# Altium PCB mainboard.PcbDoc (part 1 of 2)
Units mm, origin at the board's own origin, x right, y up, seen from the top; angles counter-clockwise.
Board outline 90.17 x 95.89 mm, 4 copper layers (F.Cu, Route2, Route15, B.Cu), stack 1.545 mm thick; 95 components, 76 nets, 509 pads, 249 vias.
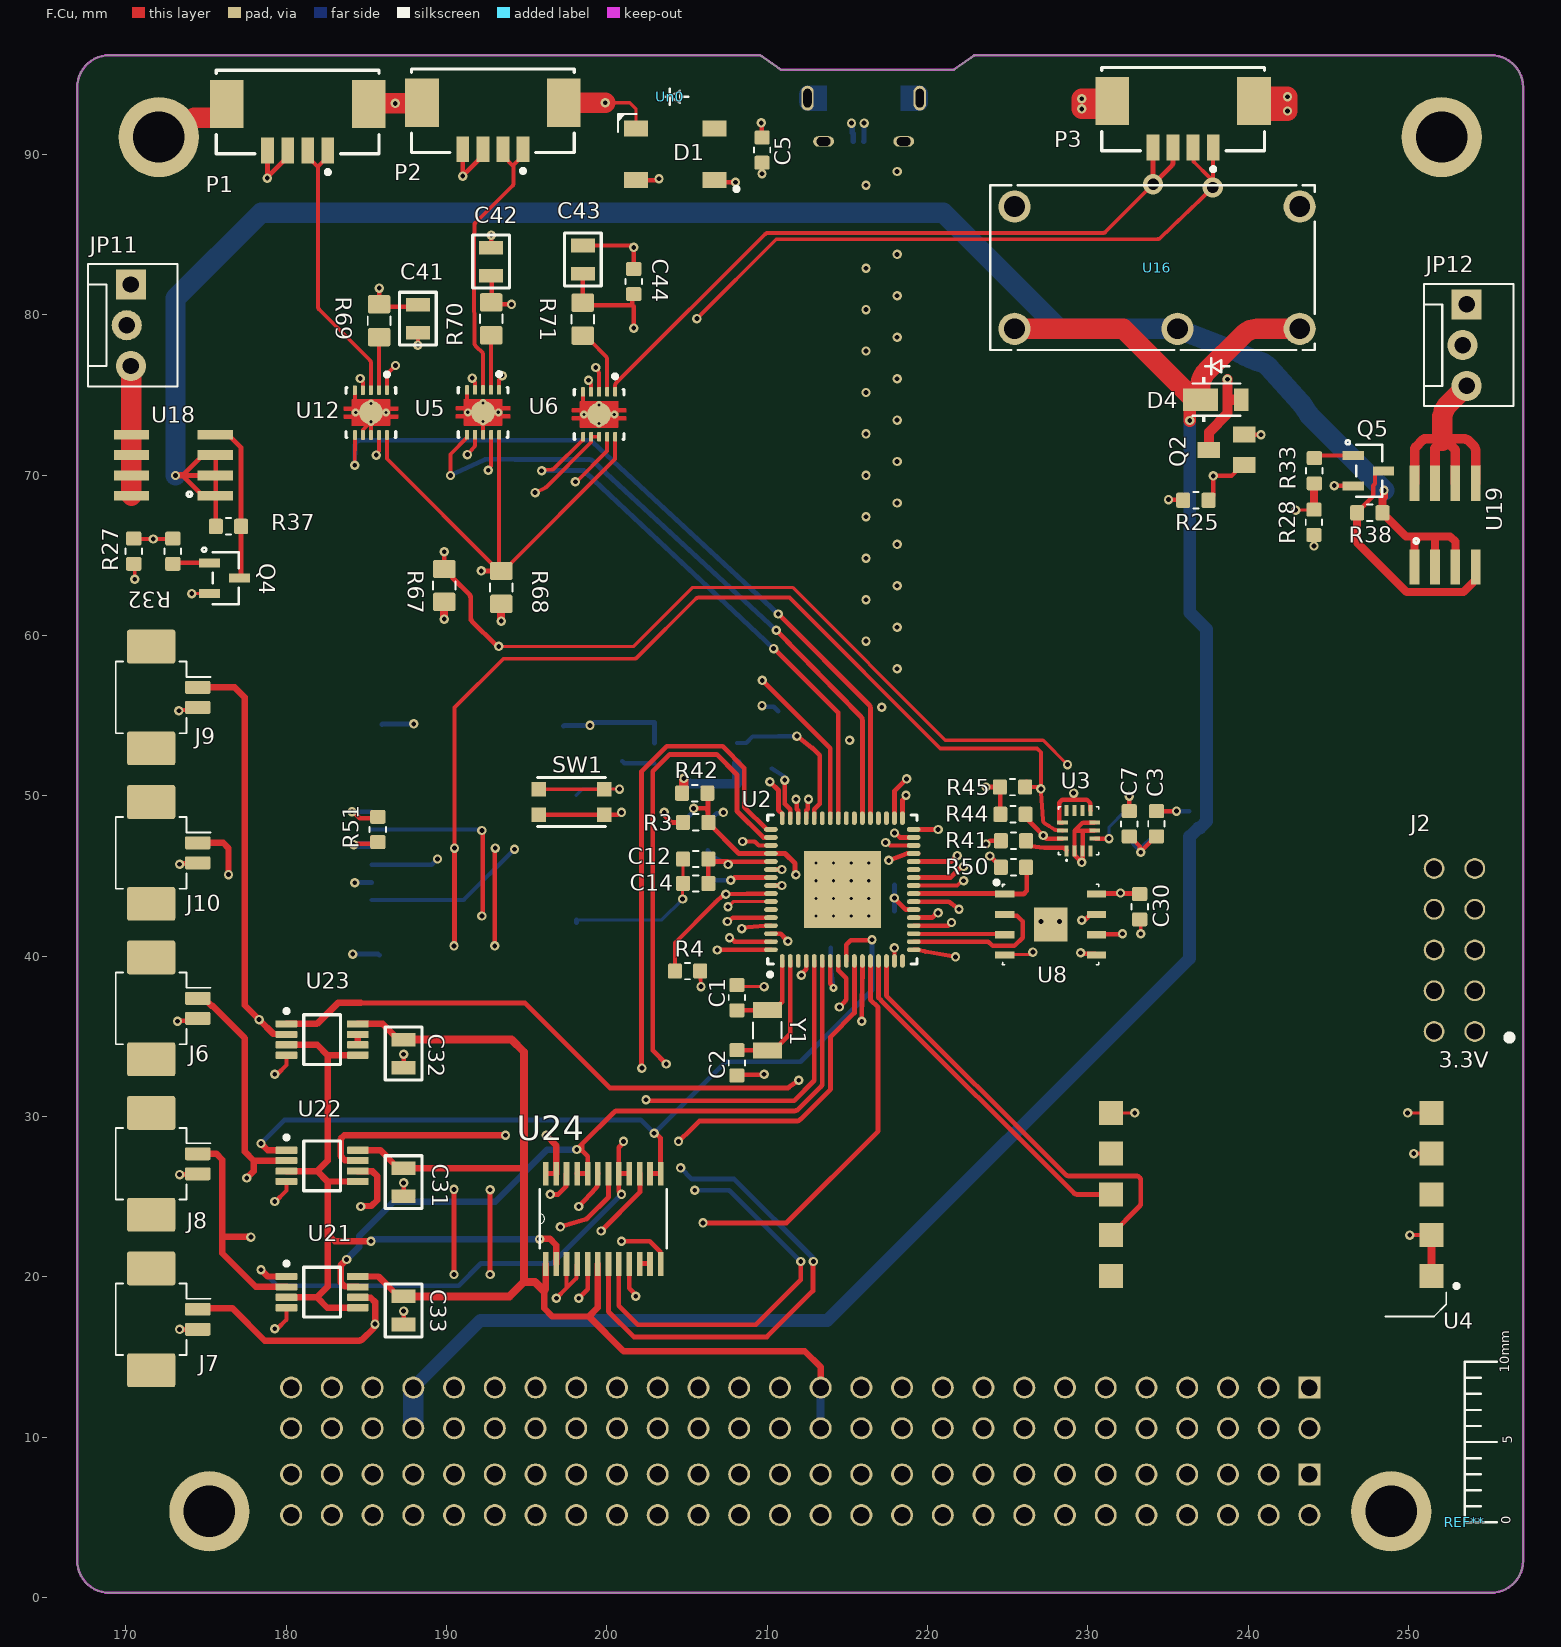
[diagram p0: F.Cu view]
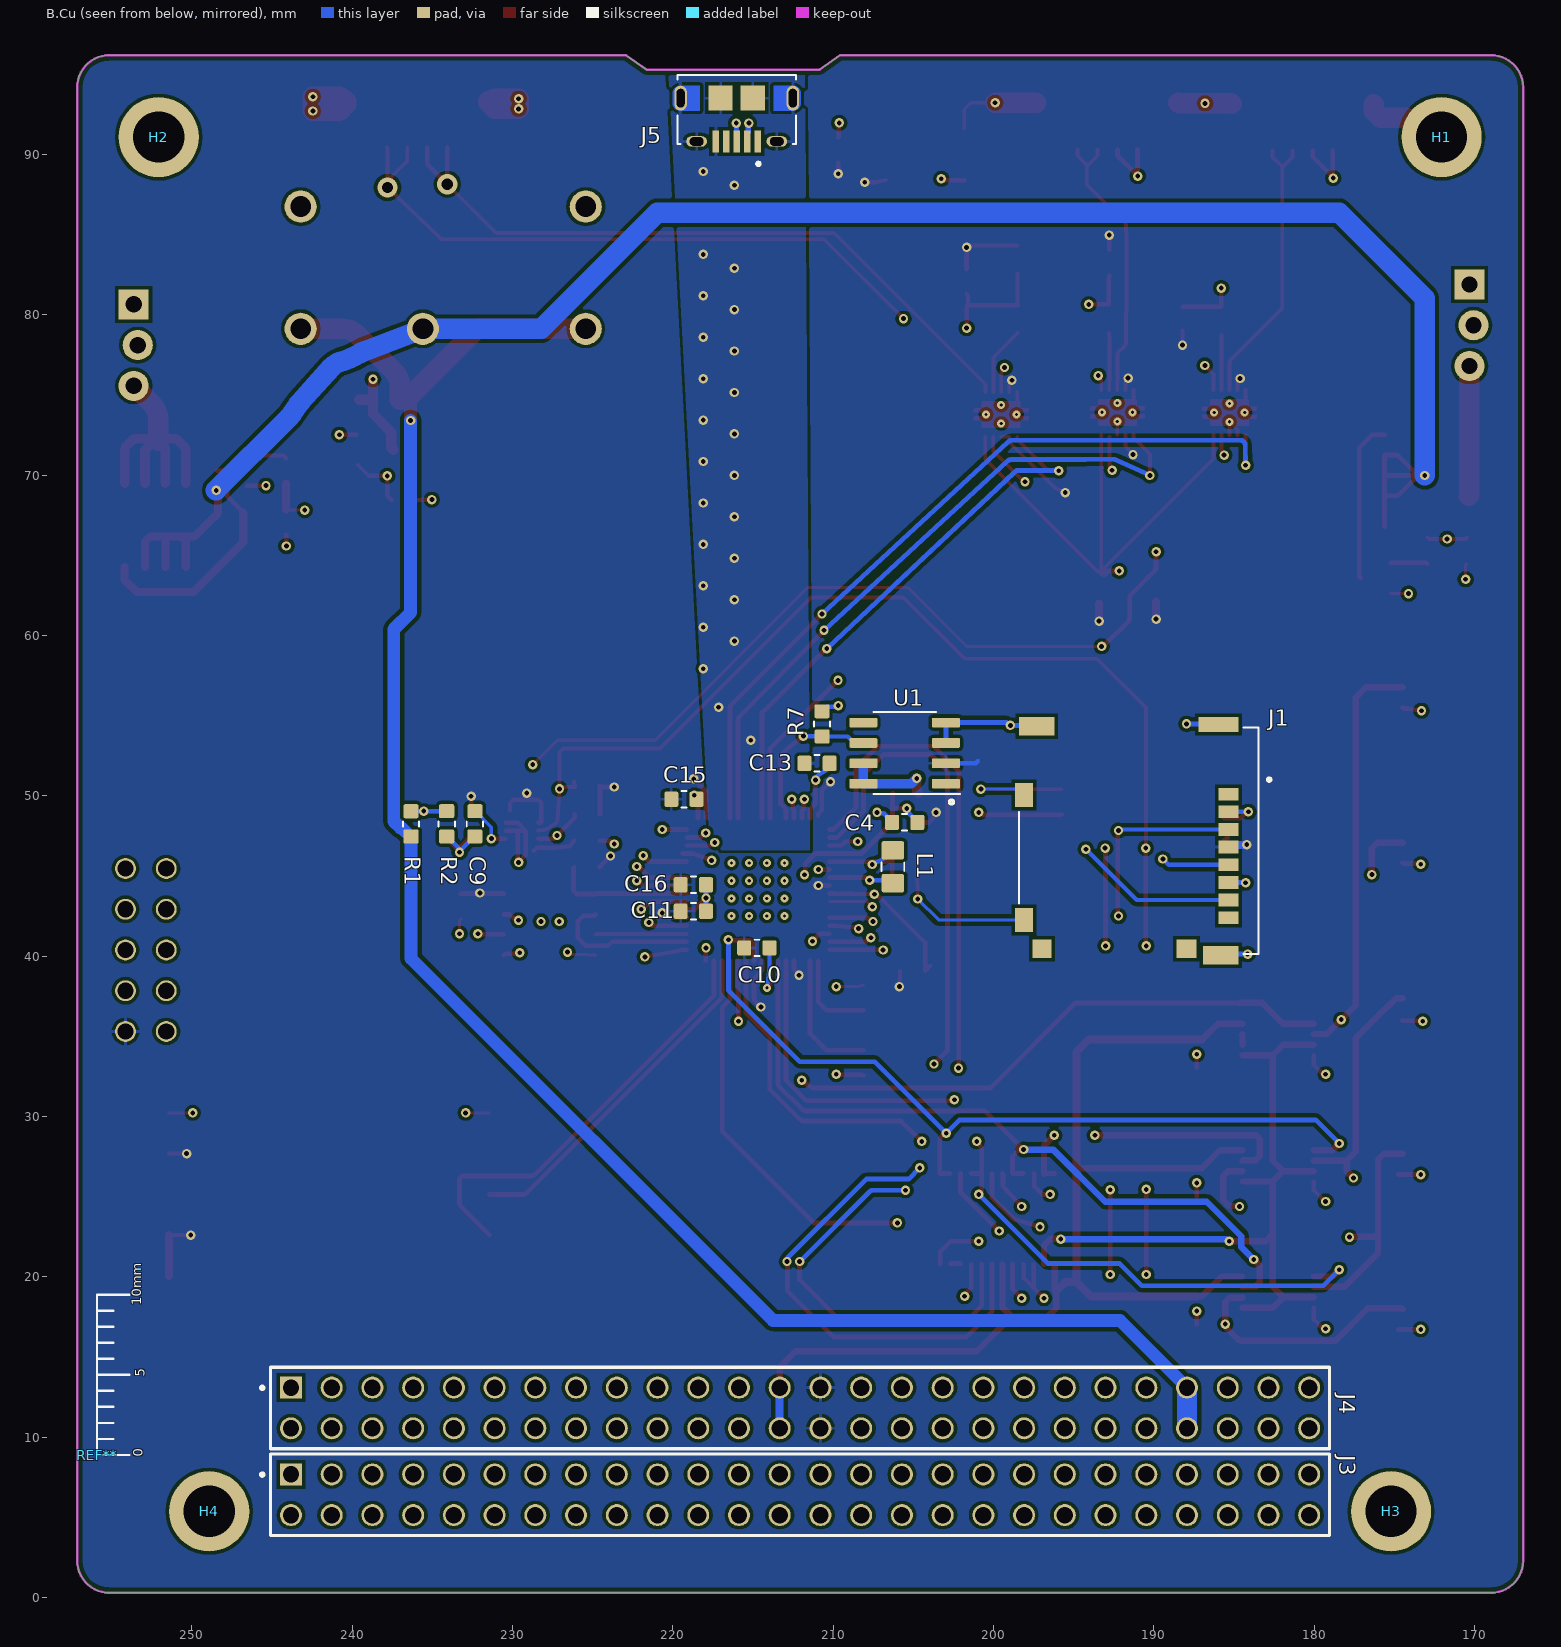
[diagram p1: B.Cu view, seen from below]
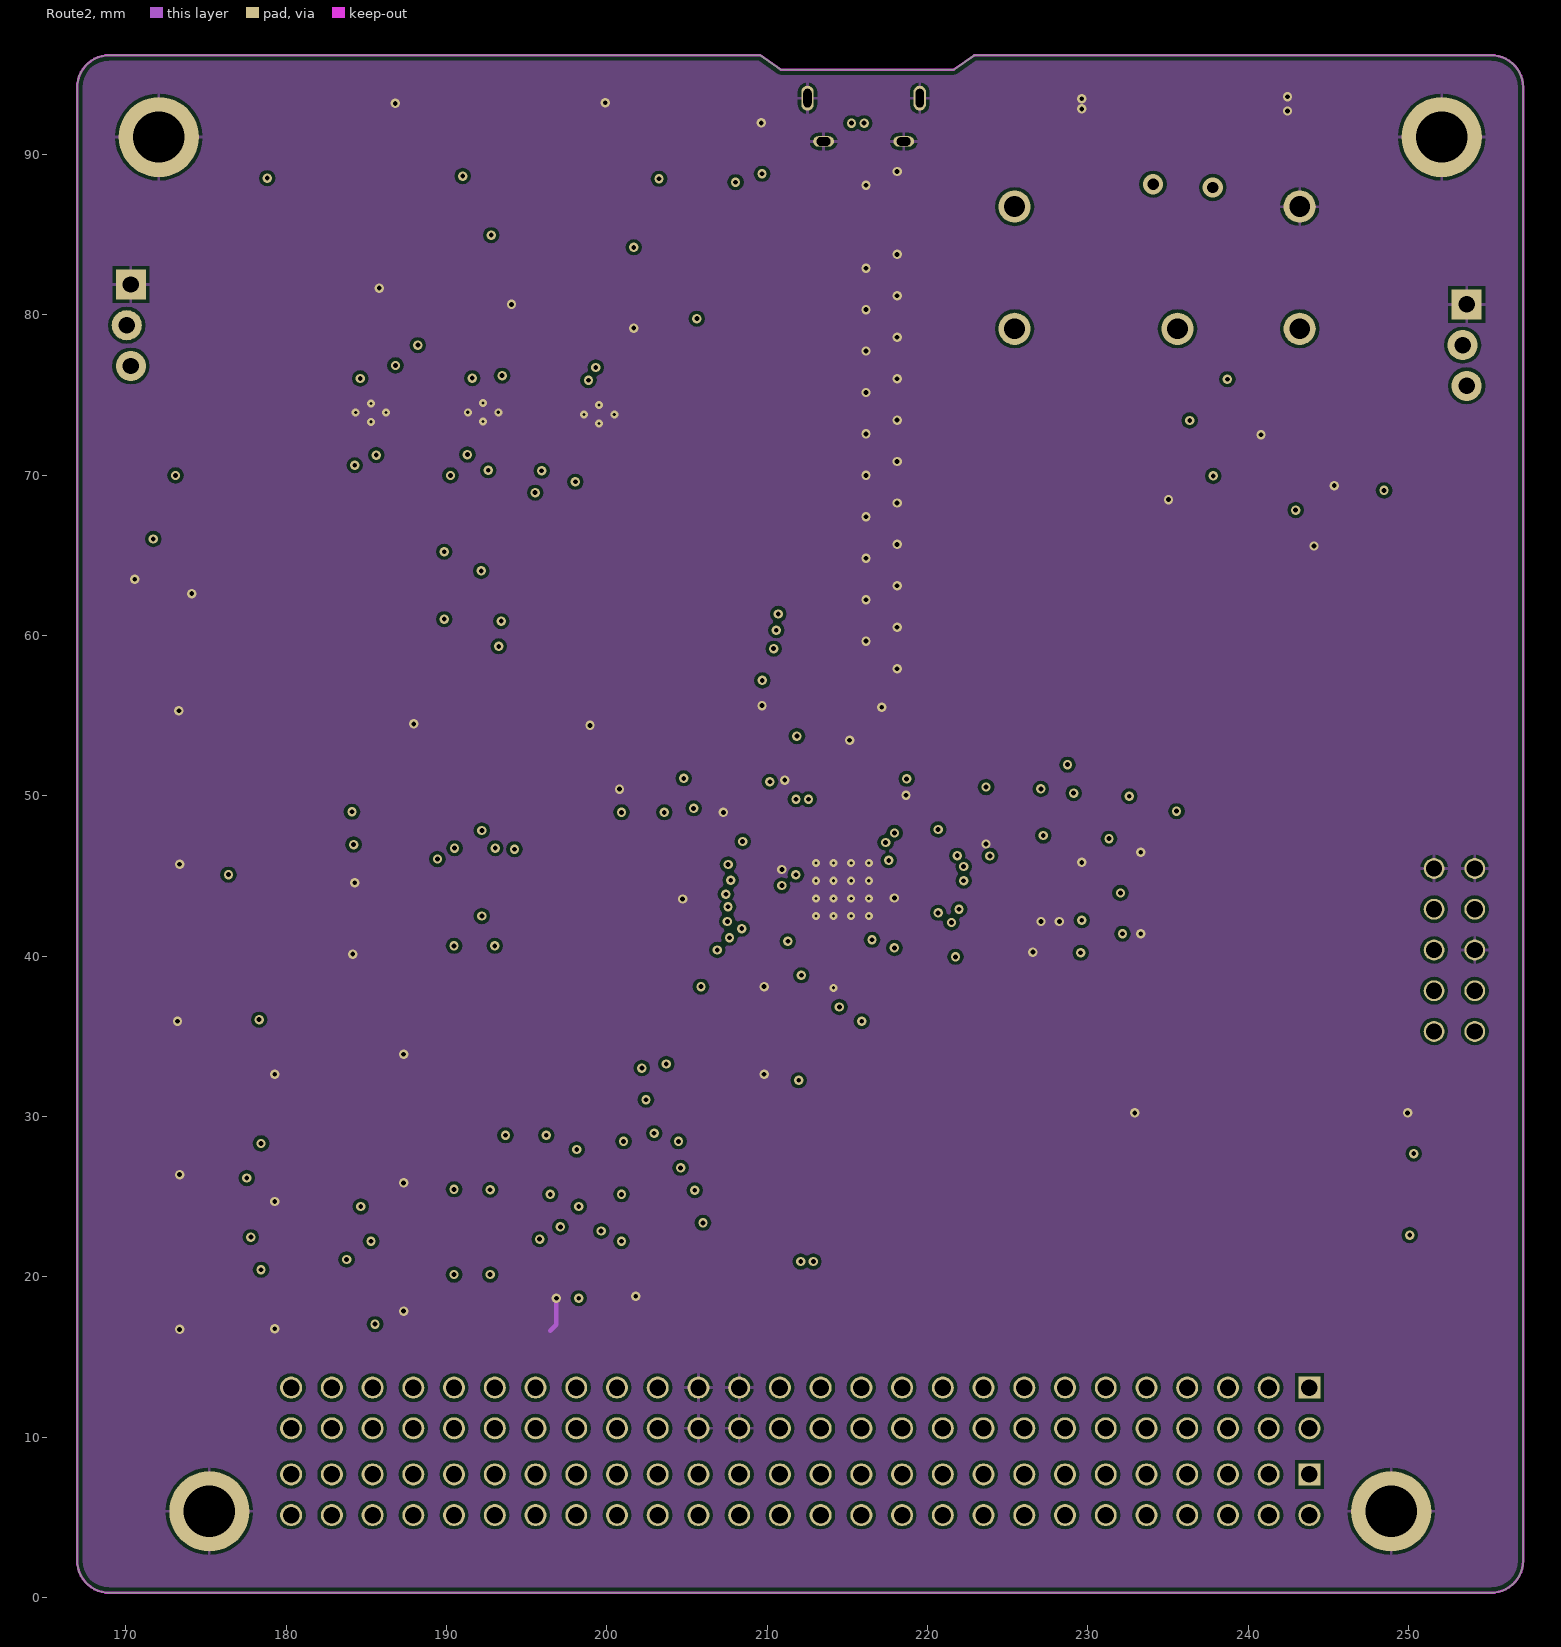
[diagram p2: Route2]
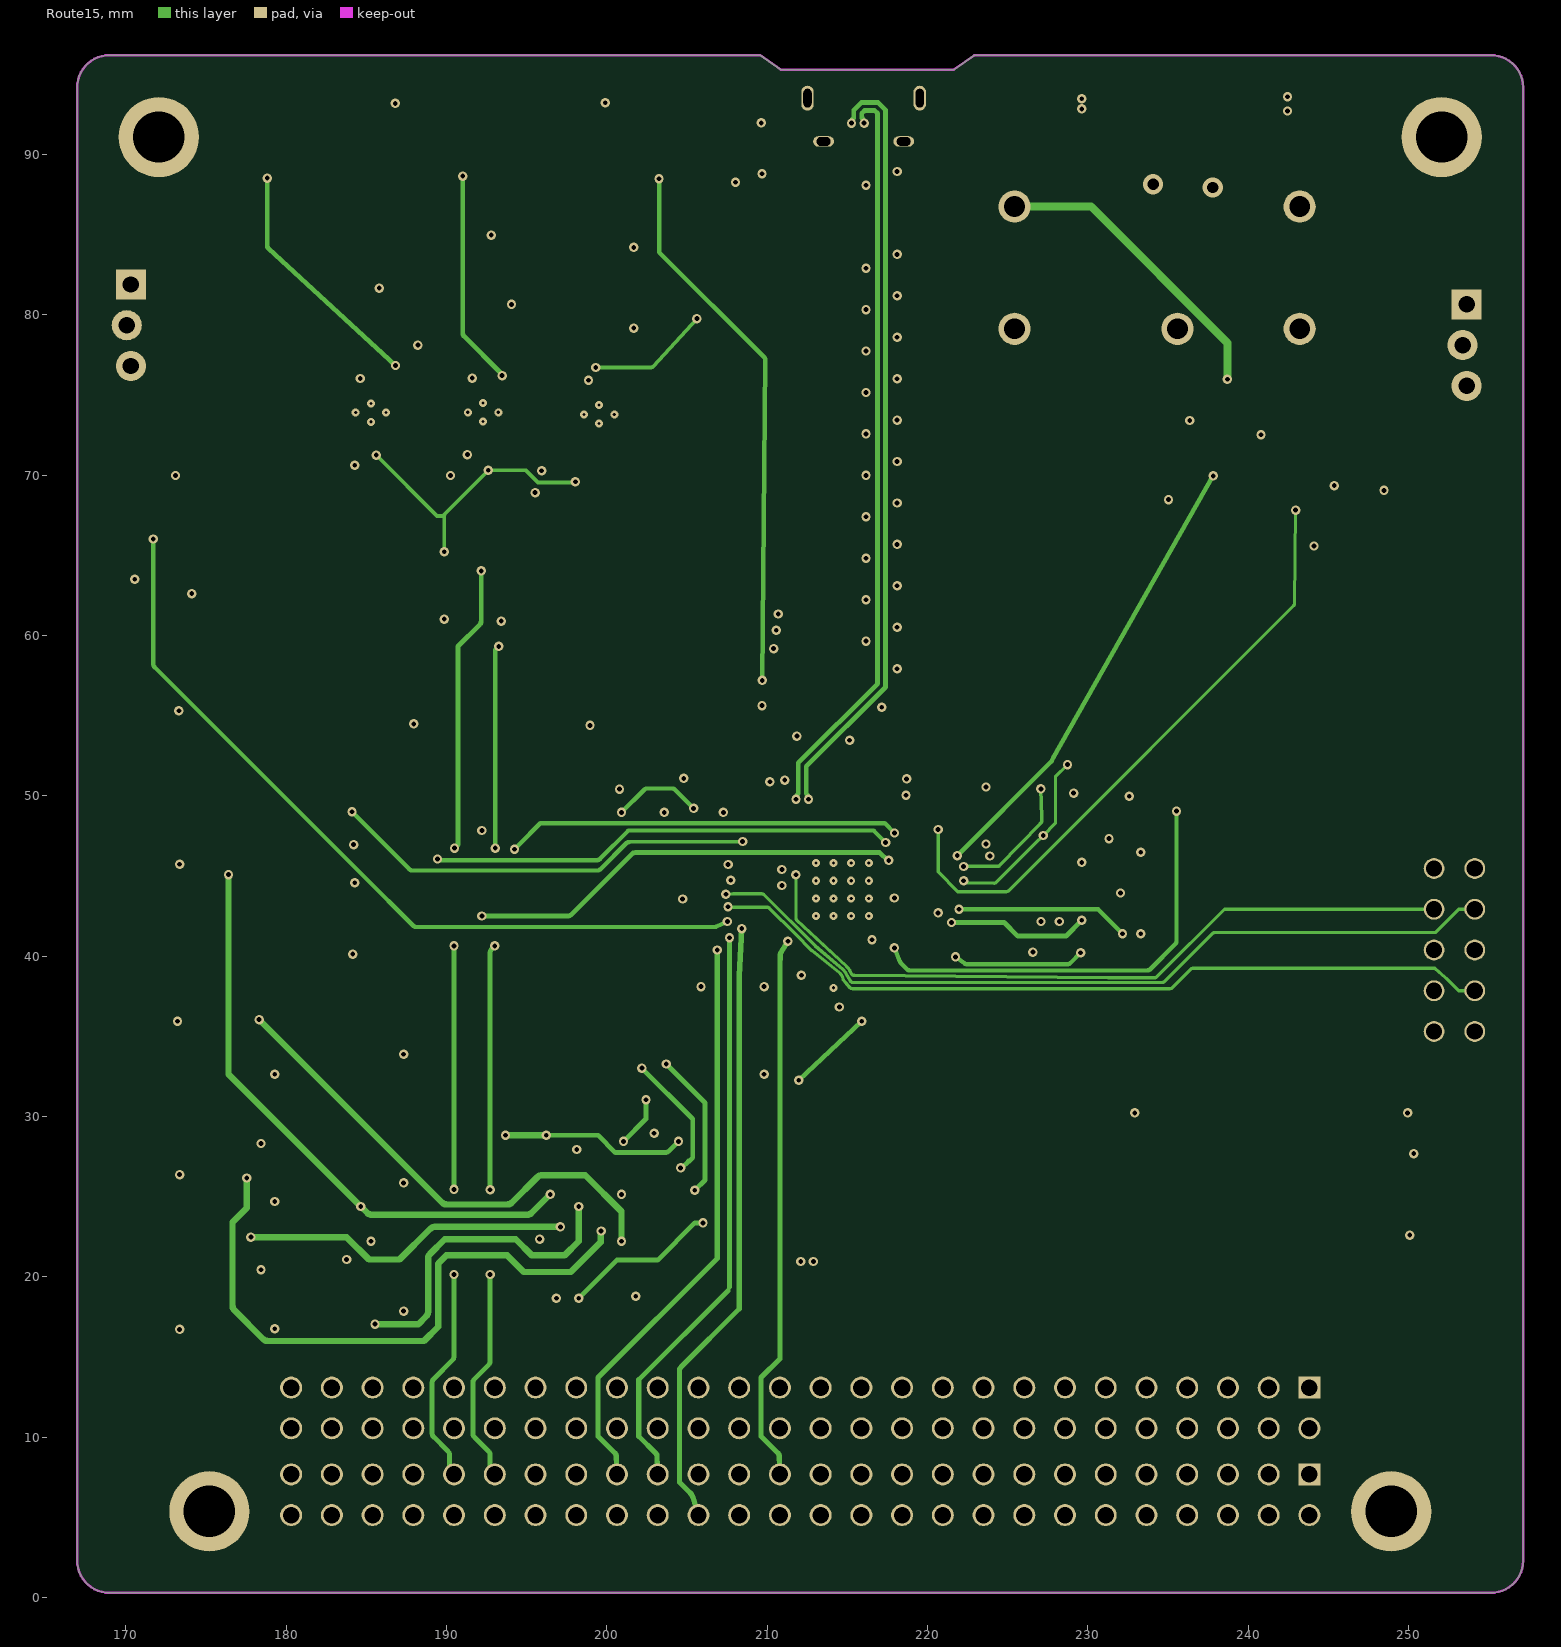
[diagram p3: Route15]

## Layer stack, top to bottom
F.Mask: solder mask 0.01, Solder Resist, Dk 3.5
F.Cu: signal copper 0.035
Dielectric 1: dielectric 0.48, FR-4, Dk 4.8
Route2: signal copper 0.0175
Dielectric2: dielectric 0.48, FR-4, Dk 4.8
Route15: signal copper 0.0175
Dielectric3: dielectric 0.48, FR-4, Dk 4.8
B.Cu: signal copper 0.035
B.Mask: solder mask 0.01, Solder Resist, Dk 3.5

## Board outline
166.97,94.184 166.97,2.299 ccw(c168.97,2.299) 255.14,0.299 ccw(c255.14,2.299) 257.14,94.184 ccw(c255.14,94.184) 222.91,96.174 221.64,95.285 210.845,95.285 209.565,96.184 168.97,96.184 ccw(c168.97,94.184) 166.97,94.184

## Design rules (kind name [scope] priority, off if disabled: settings)
BoardOutlineClearance [All] p1: gap=0.2 ignorepadtopadclearanceinfootprint=FALSE
Clearance [All] p1: gap=0.203 ignorepadtopadclearanceinfootprint=FALSE except(0.09: Arc-Arc Arc-Track Track-Track; 0.127: SMDPad-SMDPad; 0.2: Arc-SMDPad Track-SMDPad; 0.25: SMDPad-Hole THPad-Hole Via-Hole Fill-Hole Poly-Hole Region-Hole; 0.254: Arc-Via Arc-Fill Arc-Poly Arc-Region Arc-Hole Track-Via Track-Fill Track-Poly Track-Region Track-Hole; 0.33: Arc-THPad Track-THPad; 0.5: THPad-THPad)
ComponentClearance [All] p1: gap=0.127 collisioncheckmode=3 verticalgap=0.127 showdistances=TRUE
DiffPairsRouting [All] p1: maxlimit=0.3 minlimit=0.09 mostfreqgap=0.203 toplayer_maxgap=0.127 toplayer_prefgap=0.127 toplayer_minwidth=0.09 toplayer_maxwidth=0.328 toplayer_prefwidth=0.328 midlayer1_mingap=0.203 midlayer1_minwidth=0.157 midlayer1_maxwidth=0.328 midlayer1_prefwidth=0.245 midlayer2_mingap=0.203 midlayer2_minwidth=0.157 midlayer2_maxwidth=0.328 midlayer2_prefwidth=0.245 bottomlayer_maxgap=0.127 bottomlayer_prefgap=0.127 bottomlayer_minwidth=0.328 bottomlayer_maxwidth=0.328 bottomlayer_prefwidth=0.328 impedanceprofiledriven=TRUE impedanceprofileid={FEA6BCFF-8ABA-4507-B753-5AB7CB1E23BE} impedanceprofilevalue=90.000000 maxuncoupledlength=0.203
Height [All] p1: minheight=0 maxheight=1816.048 prefheight=1816.048
HoleSize [All] p1: absolutevalues=TRUE maxlimit=6.3 minlimit=0.2 maxpercent=80.000 minpercent=20.000
HoleToHoleClearance [All] p1: gap=0.25 allowstackedmicrovias=TRUE
LayerPairs [All] p1: enforce=FALSE
MinimumAnnularRing [All] p1: minimumring=0.13
MinimumSolderMaskSliver [All] p1: minsoldermaskwidth=0
PlaneConnect PlaneConnectPowerPads [InPadClass('PowerPads')] p1: planeconnectstyle=Direct reliefexpansion=0.508 reliefentries=4 reliefconductorwidth=0.254 reliefairgap=0.254
PlaneConnect [All] p2: pad.planeconnectstyle=Relief pad.reliefexpansion=0.3 pad.reliefentries=4 pad.reliefconductorwidth=0.203 pad.reliefairgap=0.203 via.planeconnectstyle=Direct via.reliefexpansion=0.3 via.reliefentries=4 via.reliefconductorwidth=0.127 via.reliefairgap=0.254
PolygonConnect PolygonConnectPowerPads [All vs (InPadClass('PowerPads'))] p1: connectstyle=Direct reliefconductorwidth=0.254 reliefentries=4 polygonreliefangle="90 Angle" airgapwidth=0.254
PolygonConnect [All] p2: thpad.connectstyle=Relief thpad.reliefconductorwidth=0.203 thpad.reliefentries=4 thpad.polygonreliefangle="90 Angle" thpad.airgapwidth=0.203 smdpad.connectstyle=Relief smdpad.reliefconductorwidth=0.203 smdpad.reliefentries=4 smdpad.polygonreliefangle="90 Angle" smdpad.airgapwidth=0.203 via.connectstyle=Direct via.reliefconductorwidth=0.127 via.reliefentries=4 via.polygonreliefangle="90 Angle" via.airgapwidth=0.254
RoutingVias [All] p1: holewidth=0.3 width=0.584 viastyle="Through Hole" minholewidth=0.2 minwidth=0.4 maxholewidth=0.6 maxwidth=1.27
SilkToSilkClearance [All] p1: silktosilkclearance=0
SilkToSolderMaskClearance [IsPad] p1: minsilkscreentomaskgap=0.15 clearancetoexposedcopper=TRUE
SolderMaskExpansion [All] p1: expansion=0.102 istentingtop=FALSE
Width [All] p1: maxlimit=25.4 minlimit=0.127 preferedwidth=0.203 midlayer1_maxwidth=25 midlayer2_maxwidth=25 minimp=50.000000 maximp=50.000000 favimp=50.000000
20 further rules are at their usual default settings.

## Classes and differential pairs
component class RF_and_GPS: C31 C32 C33 U4 U9 U10 U11 U21 U22 U23 U24
component class Connectors: C30 J1 J2 J3 J4 J5 J6 J7 J8 J9 J10 R50 R51 U8
component class Burn_Wires: D4 JP11 JP12 Q2 Q4 Q5 R25 R27 R28 R32 R33 R37 R38 U16 U18 U19
component class Avionics: C1 C2 C3 C4 C5 C7 C9 C10 C11 C12 C13 C14 C15 C16 D1 H1 H2 H3 H4 L1 R1 R2 R3 R4 R7 R41 R42 R44 R45 SW1 U1 U2 U3 Y1
component class ADCS: C41 C42 C43 C44 P1 P2 P3 R67 R68 R69 R70 R71 U5 U6 U12
differential pair USB_D: +USB_D_P -USB_D_N

## Components (designator, comment, footprint, x,y, rotation, side; value= is the part's Value field where it differs from the comment)
C1 "1uF" C_0603_1608METRIC 208.109,37.411 r90 top
C2 "1uF" C_0603_1608METRIC 208.109,33.347 r270 top
C3 "0.1uF" C_0603_1608METRIC 234.27,48.255 r270 top
C4 "1uF" C_0603_1608METRIC 205.54,48.343 r180 bottom
C5 "0.1uF" C_0603_1608METRIC 209.677,90.266 r90 top
C7 "0.1uF" C_0603_1608METRIC 232.579,48.251 r270 top
C9 "0.1uF" C_0603_1608METRIC 232.337,48.251 r90 bottom
C10 "1uF" C_0603_1608METRIC 214.757,40.513 r180 bottom
C11 "1uF" C_0603_1608METRIC 218.719,42.8 r180 bottom
C12 "10uF" C_0603_1608METRIC 205.54,46.057 r0 top
C13 "1uF" C_0603_1608METRIC 211.001,52.026 r180 bottom
C14 "1uF" C_0603_1608METRIC 205.54,44.533 r180 top
C15 "1uF" C_0603_1608METRIC 219.304,49.784 r180 bottom
C16 "10uF" C_0603_1608METRIC 218.717,44.452 r180 bottom
C30 "0.1uF" C_0603_1608METRIC 233.226,43.082 r270 top
C31 "100nF" Resistor_0805 187.325,25.908 r270 top
C32 "100nF" RESISTOR_0805 187.325,33.923 r270 top
C33 "100nF" Resistor_0805 187.325,17.907 r270 top
C41 "100nF" RESISTOR_0805 188.214,79.756 r270 top
C42 "100nF" RESISTOR_0805 192.786,83.312 r90 top
C43 "100nF" RESISTOR_0805 198.501,83.439 r90 top
C44 "10uF" C_0603_1608Metric 201.676,82.068 r270 top
D1 "WS2812B" LED_WS2812B_PLCC4_5.0X5.0MM_P3.2MM 204.27,89.999 r180 top
D4 "SBR2A40P1Q-7" PWRDI-123 238.123,74.701 r0 top value=DFLS130L
G*** "LOGO" LOGO 600,42.234 r0 top
G*** "LOGO" LOGO 600,60.452 r0 top
G*** "LOGO" LOGO 600,62.103 r0 top
G*** "LOGO" LOGO 600,60.198 r0 top
G*** "LOGO" LOGO 600,42.164 r0 top
H1 "MountingHole_Pad" MOUNTINGHOLE_3.2MM_M3_DIN965_PAD 172.061,91.078 r180 bottom locked
H2 "MountingHole_Pad" MOUNTINGHOLE_3.2MM_M3_DIN965_PAD 252.06,91.079 r180 bottom locked
H3 "MountingHole_Pad" MOUNTINGHOLE_3.2MM_M3_DIN965_PAD 175.211,5.378 r180 bottom locked
H4 "MountingHole_Pad" MOUNTINGHOLE_3.2MM_M3_DIN965_PAD 248.911,5.378 r180 bottom locked
J1 "503182-1852" MOLEX_503182-1852 191.697,47.2 r90 bottom
J2 "Conn_01x05" PINHEADER_1X05_P2.54MM_VERTICAL 254.127,35.306 r180 top
J3 "TSW-126-14-G-D" SAMTEC_TSW-126-14-G-D 212.074,6.4 r180 bottom locked
J4 "TSW-126-14-G-D" SAMTEC_TSW-126-14-G-D 212.074,11.81 r180 bottom locked
J5 "10118194-0001LF" AMPHENOL_10118194-0001LF 216.012,93.505 r0 bottom
J6 "MOLEX_532610271" MOLEX_PICOBLADE_532610271 172.085,36.743 r270 top
J7 "MOLEX_532610271" MOLEX_PICOBLADE_532610271 172.085,17.351 r270 top
J8 "MOLEX_532610271" MOLEX_PICOBLADE_532610271 172.085,27.047 r270 top
J9 "MOLEX_532610271" MOLEX_PICOBLADE_532610271 172.085,56.134 r270 top
J10 "MOLEX_532610271" MOLEX_PICOBLADE_532610271 172.085,46.438 r270 top
JP11 "Conn_01x03" MOLEX-1X3_LOCK 170.188,81.882 r270 top
JP12 "Conn_01x03" MOLEX-1X3_LOCK 253.492,80.645 r270 top
L1 "10uH" L_0805_2012METRIC_PAD1.15X1.40MM_HANDSOLDER 206.277,45.574 r90 bottom
P1 "CMP-2000-05238-1" MOLEX-53261-0471_V 180.721,91.694 r180 top
P2 "CMP-2000-05238-1" MOLEX-53261-0471_V 192.893,91.768 r180 top
P3 "CMP-2000-05238-1" MOLEX-53261-0471_V 235.936,91.874 r180 top
Q2 "FMMT491ATA" SOT23 238.635,71.577 r90 top
Q4 "IRLML2803" SOT-23 176.223,63.576 r270 top
Q5 "IRLML2803" SOT-23 247.548,70.266 r270 top
R1 "10K" R_0603_1608METRIC 236.325,48.248 r90 bottom
R2 "10K" R_0603_1608METRIC 234.103,48.251 r90 bottom
R3 "10K" R_0603_1608METRIC 205.54,48.343 r0 top
R4 "10K" R_0603_1608METRIC 205.032,39.072 r180 top
R7 "10k" R_0603_1608METRIC 210.693,54.483 r270 bottom
R25 "100k" R_0603_1608METRIC 236.73,68.424 r180 top
R27 "100k" R_0603_1608METRIC 170.495,65.254 r270 top
R28 "100k" R_0603_1608METRIC 244.094,67.056 r270 top
R32 "100k" R_0603_1608METRIC 172.934,65.254 r90 top
R33 "100k" R_0603_1608METRIC 244.119,70.266 r270 top
R37 "100k" R_0603_1608METRIC 176.403,66.802 r180 top
R38 "100k" R_0603_1608METRIC 247.577,67.647 r0 top
R41 "10k" R_0603_1608METRIC 225.352,47.194 r180 top
R42 "10k" R_0603_1608METRIC 205.48,50.162 r180 top value=10K
R44 "10K" R_0603_1608METRIC 225.323,48.845 r0 top
R45 "10K" R_0603_1608METRIC 225.298,50.546 r0 top
R50 "10k" R_0603_1608METRIC 225.352,45.543 r180 top value=10K
R51 "10k" R_0603_1608METRIC 185.718,47.9 r270 top value=10K
R67 "4.7k" L_0805_2012Metric_Pad1.15x1.40mm_HandSolder 189.857,63.119 r90 top
R68 "4.7k" L_0805_2012Metric_Pad1.15x1.40mm_HandSolder 193.413,62.992 r90 top
R69 "1.3k" L_0805_2012Metric_Pad1.15x1.40mm_HandSolder 185.801,79.629 r270 top
R70 "1.3k" L_0805_2012Metric_Pad1.15x1.40mm_HandSolder 192.786,79.742 r270 top
R71 "1.3k" L_0805_2012Metric_Pad1.15x1.40mm_HandSolder 198.493,79.726 r270 top
REF** "Gauge_10mm_Type1_SilkScreenTop" GAUGE_10MM_TYPE1_SILKSCREENTOP 253.492,4.699 r90 top
REF** "Gauge_10mm_Type1_SilkScreenTop" GAUGE_10MM_TYPE1_SILKSCREENTOP 255.905,8.89 r90 bottom
SW1 "KMR231NG LFS" BTN_KMR2_4.6X2.8 197.793,49.613 r180 top
U1 "MAX706RESA" SO-8_3.9X4.9MM_P1.27MM 205.54,52.661 r180 bottom
U2 "120MHZ 512KB Flash 64 TQFP" ATSAMD51J19A-MU 214.684,44.152 r90 top
U3 "BMX160" BMX160 229.416,47.829 r270 top
U4 "HT-GPS200.20" HT-GPS200.20 241.427,25.146 r180 top
U5 "DRV8830DRCR" FP-DRC0010J-MFG 192.278,73.914 r270 top
U6 "DRV8830DRCR" FP-DRC0010J-MFG 199.517,73.787 r270 top
U8 "MR25H40MDF" SON127P600X500X90-9N 227.675,41.971 r0 top
U12 "DRV8830DRCR" FP-DRC0010J-MFG 185.285,73.898 r270 top
U16 "PE014006" RELAY5-PE_CO 242.621,86.741 r90 top
U18 "NDS8434" NDS8434 172.974,70.612 r270 top
U19 "NDS8434" NDS8434 252.276,66.885 r180 top
U21 "OPA2381AIDGKT" DGK0008A_N 182.245,19.05 r0 top
U22 "OPA2381AIDGKT" DGK0008A_N 182.245,26.924 r0 top
U23 "OPA2381AIDGKT" DGK0008A_N 182.245,34.798 r0 top
U24 "AD5206BRUZ50" *SOP65P640X120-24N 199.771,23.622 r90 top
Un0 "" ? 203.962,93.599 r180 top
Y1 "32.768kHz" CRYSTAL_SMD_3215-2PIN_3.2X1.5MM 210.014,35.379 r90 top

## Footprints (in the part's own frame and the unit in brackets; to place one, negate y for a bottom-side part, rotate by r counter-clockwise, add the part's x,y. Pads: shape width x height; smd on the part's side, far side on the other; paste and mask are expansions set on the pad)
*SOP65P640X120-24N [mil]
  rect 58x14 smd: 1(-111,141) 2(-111,115) 3(-111,90) 4(-111,64) 5(-111,38) 6(-111,13) 7(-111,-13) 8(-111,-38) 9(-111,-64) 10(-111,-90) 11(-111,-115) 12(-111,-141) 13(111,-141) 14(111,-115) 15(111,-90) 16(111,-64) 17(111,-38) 18(111,-13) 19(111,13) 20(111,38) 21(111,64) 22(111,90) 23(111,115) 24(111,141)
  silkscreen extent -72,-156 72,156
AMPHENOL_10118194-0001LF [mm]
  rect 0.4x1.35 smd: 1(-1.3,2.7) 2(-0.65,2.7) 3(0,2.7) 4(0.65,2.7) 5(1.3,2.7)
  oval 1.3x0.65 hole 0.55 slot 0.85 at 0 deg: S1(-2.5,2.7) S2(2.5,2.7)
  oval 0.775x1.55 hole 0.5 slot 1.15 at 90 deg: S3(-3.5,0) S6(3.5,0)
  rect 1.5x1.55 smd: S4(-1,0) S5(1,0)
  F.Cu region: 192 vertices and 0 holes, not listed, extent 2.3,-0.78 4,0.775
  F.Cu region: 192 vertices and 0 holes, not listed, extent -4,-0.775 -2.3,0.78
  silkscreen extent -3.7,-1.45 3.7,4.2, body extent -4.02,-2.66 4.02,2.92, height 2.72
ATSAMD51J19A-MU [mm] "QFN, 64-Leads, Body 9.00x9.00mm, Pitch 0.50mm, Thermal Pad 4.80x4.80mm, IPC Medium Density"
  oval 0.85x0.3 smd: 1(-4.45,3.75) 2(-4.45,3.25) 3(-4.45,2.75) 4(-4.45,2.25) 5(-4.45,1.75) 6(-4.45,1.25) 7(-4.45,0.75) 8(-4.45,0.25) 9(-4.45,-0.25) 10(-4.45,-0.75) 11(-4.45,-1.25) 12(-4.45,-1.75) 13(-4.45,-2.25) 14(-4.45,-2.75) 15(-4.45,-3.25) 16(-4.45,-3.75) 33(4.45,-3.75) 34(4.45,-3.25) 35(4.45,-2.75) 36(4.45,-2.25) 37(4.45,-1.75) 38(4.45,-1.25) 39(4.45,-0.75) 40(4.45,-0.25) 41(4.45,0.25) 42(4.45,0.75) 43(4.45,1.25) 44(4.45,1.75) 45(4.45,2.25) 46(4.45,2.75) 47(4.45,3.25) 48(4.45,3.75)
  oval 0.3x0.85 smd: 17(-3.75,-4.45) 18(-3.25,-4.45) 19(-2.75,-4.45) 20(-2.25,-4.45) 21(-1.75,-4.45) 22(-1.25,-4.45) 23(-0.75,-4.45) 24(-0.25,-4.45) 25(0.25,-4.45) 26(0.75,-4.45) 27(1.25,-4.45) 28(1.75,-4.45) 29(2.25,-4.45) 30(2.75,-4.45) 31(3.25,-4.45) 32(3.75,-4.45) 49(3.75,4.45) 50(3.25,4.45) 51(2.75,4.45) 52(2.25,4.45) 53(1.75,4.45) 54(1.25,4.45) 55(0.75,4.45) 56(0.25,4.45) 57(-0.25,4.45) 58(-0.75,4.45) 59(-1.25,4.45) 60(-1.75,4.45) 61(-2.25,4.45) 62(-2.75,4.45) 63(-3.25,4.45) 64(-3.75,4.45)
  rect 4.8x4.8 smd: 65(0,0)
  silkscreen extent -5.42,-4.65 4.65,4.65, body extent -4.5,-4.5 4.5,4.5, height 0.8
BMX160 [mm]
  rect 0.675x0.25 smd mask+0.051: 1(1.262,-0.75) 2(1.262,-0.25) 3(1.262,0.25) 4(1.262,0.75) 8(-1.262,0.75) 9(-1.262,0.25) 10(-1.262,-0.25) 11(-1.262,-0.75)
  rect 0.25x0.675 smd mask+0.051: 5(0.5,1.012) 6(0,1.012) 7(-0.5,1.012) 12(-0.5,-1.012) 13(0,-1.012) 14(0.5,-1.012)
  silkscreen extent -1.5,-1.25 1.9,1.25
BTN_KMR2_4.6X2.8 [mm]
  rect 0.9x0.9 smd mask+0.051: A(2.05,0.8) A'(-2.05,0.8) B(2.05,-0.8) B'(-2.05,-0.8)
  silkscreen extent -2.1,-1.53 2.1,1.53
C_0603_1608METRIC [mm]
  rrect25% 0.875x0.95 smd mask+0.051: 1(-0.787,0) 2(0.787,0)
  silkscreen extent -0.16,-0.51 0.16,0.51
C_0603_1608Metric [mm]
  rrect25% 0.875x0.95 smd mask+0.051: 1(-0.787,0) 2(0.787,0)
  silkscreen extent -0.16,-0.51 0.16,0.51
CRYSTAL_SMD_3215-2PIN_3.2X1.5MM [mm]
  rect 1x1.8 smd mask+0.051: 1(1.25,0) 2(-1.25,0)
  silkscreen extent -0.51,-0.89 0.51,0.89
DGK0008A_N [mm] "TSOP, 8-Leads, Body 3.1x3.1mm, Pitch 0.65mm, IPC Medium Density"
  rrect22% 1.35x0.45 smd: 1(-2.225,0.975) 2(-2.225,0.325) 3(-2.225,-0.325) 4(-2.225,-0.975) 5(2.225,-0.975) 6(2.225,-0.325) 7(2.225,0.325) 8(2.225,0.975)
  silkscreen extent -2.35,-1.55 1.15,1.9, body extent -2.45,-1.5 2.45,1.5, height 0.94
FP-DRC0010J-MFG [mm]
  rrect42% 0.6x0.24 smd paste+0 mask+0: 1(-1.4,1) 2(-1.4,0.5) 3(-1.4,0) 4(-1.4,-0.5) 5(-1.4,-1) 6(1.4,-1) 7(1.4,-0.5) 8(1.4,0) 9(1.4,0.5) 10(1.4,1)
  round 1.485 smd paste-1000 mask+0: 11(0,0)
  F.Cu region: -0.825,-1.15 -0.818,-1.175 -0.8,-1.193 -0.775,-1.2 -0.775,-1.2 -0.375,-1.2 -0.375,-1.65 -0.368,-1.675 -0.35,-1.693 -0.325,-1.7 -0.325,-1.7 -0.175,-1.7 -0.156,-1.696 -0.14,-1.685 -0.129,-1.669 -0.125,-1.65 -0.125,-1.65 -0.125,-1.2 0.125,-1.2 0.125,-1.65 0.129,-1.669 0.14,-1.685 0.156,-1.696 0.175,-1.7 0.175,-1.7 0.325,-1.7 0.35,-1.693 0.368,-1.675 0.375,-1.65 0.375,-1.65 0.375,-1.2 0.775,-1.2 0.8,-1.193 0.818,-1.175 0.825,-1.15 0.825,-1.15 0.825,1.15 0.818,1.175 0.8,1.193 0.775,1.2 0.775,1.2 0.375,1.2 0.375,1.65 0.368,1.675 0.35,1.693 0.325,1.7 0.325,1.7 0.175,1.7 0.156,1.696 0.14,1.685 0.129,1.669 0.125,1.65 0.125,1.65 0.125,1.2 -0.125,1.2 -0.125,1.65 -0.129,1.669 -0.14,1.685 -0.156,1.696 -0.175,1.7 -0.175,1.7 -0.325,1.7 -0.35,1.693 -0.368,1.675 -0.375,1.65 -0.375,1.65 -0.375,1.2 -0.775,1.2 -0.8,1.193 -0.818,1.175 -0.825,1.15 -0.825,1.15
  silkscreen extent -2.5,-1.55 1.55,1.55
GAUGE_10MM_TYPE1_SILKSCREENTOP [mm]
  silkscreen extent 0,-2 10,0
HT-GPS200.20 [mm] "HT-GPS200.20 GNSS Module"
  rect 1.5x1.5 smd: 1(-10,5.08) 2(-10,2.54) 3(-10,0) 4(-10,-2.54) 5(-10,-5.08) 6(10,-5.08) 7(10,-2.54) 8(10,0) 9(10,2.54) 10(10,5.08)
  silkscreen extent -11.68,5.59 -7.11,7.62, body extent -10,-7.07 10,7.43, height 3.1
L_0805_2012METRIC_PAD1.15X1.40MM_HANDSOLDER [mm]
  rrect22% 1.15x1.4 smd mask+0.051: 1(1.025,0) 2(-1.025,0)
  silkscreen extent -0.26,-0.71 0.26,0.71
L_0805_2012Metric_Pad1.15x1.40mm_HandSolder [mm]
  rrect22% 1.15x1.4 smd mask+0.051: 1(1.025,0) 2(-1.025,0)
  silkscreen extent -0.26,-0.71 0.26,0.71
LED_WS2812B_PLCC4_5.0X5.0MM_P3.2MM [mm]
  rect 1.5x1 smd mask+0.051: 1(-2.45,1.6) 2(-2.45,-1.6) 3(2.45,-1.6) 4(2.45,1.6)
  silkscreen extent -3.94,-2.53 3.57,2.29
LOGO [mm]
MOLEX-1X3_LOCK [mil]
  rect 74x74 hole 40 paste-74 mask+2.5: 1(0,5)
  round 74 hole 40 paste-74 mask+2.5: 2(100,-5) 3(200,5)
  silkscreen extent -50,-100 250,120
MOLEX-53261-0471_V [mm] "SMD, 4-Leads, Body 10.15x5.2mm, Pitch 1.25mm"
  rect 0.8x1.6 smd: 1(-1.875,1.45) 2(-0.625,1.45) 3(0.625,1.45) 4(1.875,1.45)
  rect 2.1x3 smd: MP1(-4.425,-1.45) MP2(4.425,-1.45)
  silkscreen extent -5.08,-3.55 5.08,2.93, body extent -5.08,-3.55 5.07,1.65, height 3.4
MOLEX_503182-1852 [mm]
  rect 0.8x1.24 smd mask+0.064: 1(2.9,-6.355) 2(1.8,-6.355) 3(0.7,-6.355) 4(-0.4,-6.355) 5(-1.5,-6.355) 6(-2.6,-6.355) 7(-3.7,-6.355) 8(-4.8,-6.355)
  rect 1.16x1.2 smd mask+0.064: DT(-6.74,5.275)
  rect 0.95x2.5 smd mask+0.064: P1(7.245,-5.725)
  rect 1.15x2.2 smd mask+0.064: P2(-7.145,-5.875) P3(7.145,5.605)
  rect 1.5x1.15 smd mask+0.064: P4(2.84,6.4) P5(-4.94,6.4)
  rect 1.16x1.25 smd mask+0.064: SW(-6.74,-3.725)
  silkscreen extent -7.07,-8.99 7.07,6.73
MOLEX_PICOBLADE_532610271 [mm]
  rrect25% 0.8x1.6 smd: 1(-0.625,2.4) 2(0.625,2.4)
  rrect12% 2.1x3 smd: MP(-3.175,-0.5) MP(3.175,-0.5)
  silkscreen extent -2.23,-2.71 2.23,3.2
MOUNTINGHOLE_3.2MM_M3_DIN965_PAD [mm]
  round 5 hole 3.2 paste-5 mask+0.051: 1(0,0)
NDS8434 [mil]
  rect 24x87 smd mask+2: 1(75,103) 2(25,103) 3(-25,103) 4(-75,103) 5(-75,-103) 6(-25,-103) 7(25,-103) 8(75,-103)
  silkscreen extent 65,33 77,45
PINHEADER_1X05_P2.54MM_VERTICAL [mm]
  round 1.3 hole 1.016 paste-1.7 mask+0.051: 1(0,0) 2(0,-2.54) 3(0,-5.08) 4(0,-7.62) 5(0,-10.16) 6(2.54,0) 7(2.54,-2.54) 8(2.54,-5.08) 9(2.54,-7.62) 10(2.54,-10.16)
  silkscreen extent -2.29,0.25 -2.03,0.51
PWRDI-123 [mm]
  rect 0.9x1.4 smd mask+0.064: A(1.45,0)
  rect 2.2x1.4 smd mask+0.064: C(-1.1,0)
  silkscreen extent -1.6,-1.4 1.4,2.6
R_0603_1608METRIC [mm]
  rrect25% 0.875x0.95 smd mask+0.051: 1(-0.787,0) 2(0.787,0)
  silkscreen extent -0.16,-0.51 0.16,0.51
RELAY5-PE_CO [mil]
  round 79 hole 51 paste-79 mask+2.5: 1(-300,677) 5(0,677) 11(-300,277) 12(0,-23) 14(-300,-23)
  silkscreen extent -352,-60 52,737
Resistor_0805 [mm]
  rect 0.85x1.5 smd: 1(-0.875,0) 2(0.875,0)
  silkscreen extent -1.65,-1.14 1.65,1.14
RESISTOR_0805 [mm]
  rect 0.85x1.5 smd: 1(-0.875,0) 2(0.875,0)
  silkscreen extent -1.65,-1.14 1.65,1.14
SAMTEC_TSW-126-14-G-D [mm]
  rect 1.37x1.37 hole 1.02: 01(-31.737,1.283)
  round 1.37 hole 1.02: 02(-31.737,-1.257) 03(-29.197,1.283) 04(-29.197,-1.257) 05(-26.657,1.283) 06(-26.657,-1.257) 07(-24.117,1.283) 08(-24.117,-1.257) 09(-21.577,1.283) 10(-21.577,-1.257) 11(-19.037,1.283) 12(-19.037,-1.257) 13(-16.497,1.283) 14(-16.497,-1.257) 15(-13.957,1.283) 16(-13.957,-1.257) 17(-11.417,1.283) 18(-11.417,-1.257) 19(-8.877,1.283) 20(-8.877,-1.257) 21(-6.337,1.283) 22(-6.337,-1.257) 23(-3.797,1.283) 24(-3.797,-1.257) 25(-1.257,1.283) 26(-1.257,-1.257) 27(1.283,1.283) 28(1.283,-1.257) 29(3.823,1.283) 30(3.823,-1.257) 31(6.363,1.283) 32(6.363,-1.257) 33(8.903,1.283) 34(8.903,-1.257) 35(11.443,1.283) 36(11.443,-1.257) 37(13.983,1.283) 38(13.983,-1.257) 39(16.523,1.283) 40(16.523,-1.257) 41(19.063,1.283) 42(19.063,-1.257) 43(21.603,1.283) 44(21.603,-1.257) 45(24.143,1.283) 46(24.143,-1.257) 47(26.683,1.283) 48(26.683,-1.257) 49(29.223,1.283) 50(29.223,-1.257) 51(31.763,1.283) 52(31.763,-1.257)
  silkscreen extent -33.63,-2.53 33.03,2.55, body extent -33.01,-2.53 33.03,2.55, height 10.67
SO-8_3.9X4.9MM_P1.27MM [mm]
  rrect25% 1.75x0.6 smd mask+0.051: 1(2.575,-1.905) 2(2.575,-0.635) 3(2.575,0.635) 4(2.575,1.905) 5(-2.575,1.905) 6(-2.575,0.635) 7(-2.575,-0.635) 8(-2.575,-1.905)
  silkscreen extent -1.95,-2.56 3.45,2.56
SON127P600X500X90-9N [mm]
  rect 1.2x0.45 smd mask+0.064: 1(-2.865,1.905) 2(-2.865,0.635) 3(-2.865,-0.635) 4(-2.865,-1.905) 5(2.865,-1.905) 6(2.865,-0.635) 7(2.865,0.635) 8(2.865,1.905)
  rect 2.1x2.1 smd mask+0.064: 9(0,0)
  silkscreen extent -3.5,-2.5 3,2.75
SOT23 [mm]
  rect 1x1.4 smd mask+0.064: 1(-0.95,-1.1) 2(0.95,-1.1) 3(0,1.1)
SOT-23 [mil]
  rect 22x52 smd mask+2.5: 1(-37.5,-39.5) 2(37.5,-39.5) 3(0,34.5)
  silkscreen extent -75,-58 64,32
? [mm]
  silkscreen extent -1.11,-0.51 0.42,0.51

## Part data
C1 C2 C4 C10 C11 C13 C14 C15: library part CAP_CERAMIC0603_NO-Adafruit_Feather_M4_Express-eagle-import-lab64_SAM32-rescue-SAMD-10-rescue-SAM32-rescue, MPN=CL10A105KB8NNNC
C3 C5 C7 C9: library part 0.1UF-25V(+80_-20%)(0603), MPN=CL10B104KB8NNNL
C12 C16: library part CAP_CERAMIC0805-NOOUTLINE-Adafruit_Feather_M4_Express-eagle-import-lab64_SAM32-rescue-SAMD-10-rescue-SAM32-rescue, MPN=CL10A106MP8NNNC
C30: library part 2.2UF-0603-10V-20%, MPN=CL10B104KO8NNNC
C31 C32 C33 C41 C42 C43: library part CL21B104KBCNNNC, MPN=CL21B104KBCNNNC
C44: library part 1210ZC106KAT2A, MPN=1210ZC106KAT2A
D1: MPN=COM-16347, Proto=WS2812B
D4: library part DFLS130L, MPN=DFLS130L, Proto=DFLS130L
J1: MPN=5031821852
J5: "Micro Usb, 2.0 Type b, Rcpt, Smt", Package=None, Availability=Unavailable, MPN=10118194-0001LF, Price=None
J6 J7 J8 J9 J10: library part Molex_PicoBlade_532610271, MPN=532610271
JP11 JP12: library part M03POLAR_LOCK
L1: library part INDUCTOR-Adafruit_Feather_M4_Express-eagle-import-lab64_SAM32-rescue-SAMD-10-rescue-SAM32-rescue, MPN=LBR2012T100K
P1 P2 P3: "Male Header, Pitch 1.25 mm, 1 x 4 Position, Height 3.4 mm, -40 to 85 degC, RoHS, Tape and Reel", MPN=0533984004, Supplier 1=Digi-Key
Q2: library part BC846, MPN=FMMT491ATA, Proto=S8050
Q4 Q5: library part IRLML2803TRPBF, MPN=IRLML2803, Proto=2302
R1 R2 R3 R4 R42 R44 R45 R50 R51: library part R_US, MPN=CRGCQ0603J10K
R7 R41: library part R-US_R0603, MPN=RNCP0603FTD10K0
R25 R27 R28 R32 R33 R37 R38: library part RESISTOR0603, MPN=RC0603JR-07100KL
R67 R68: library part RC0805FR-074K7L, MPN=RC0805FR-074K7L
R69 R70 R71: library part ERJ-6ENF1301V, MPN=ERJ-6ENF1301V
REF** REF**: "Gauge, Massstab, 10mm, SilkScreenTop, Type 1,"
SW1: library part SWITCH_TACT_SMT4.6X2.8-Adafruit_Feather_M4_Express-eagle-import-lab64_SAM32-rescue-SAMD-10-rescue-SAM32-rescue, MPN="KMR231NG LFS"
U1: library part MAX708RESA-T, MPN=MAX706RESA, Proto=MAX706RESA
U2: library part ATSAMD51J20A-AU-ATSAMD51J20A-AU-lab64_SAM32-rescue-lab64_SAM32-rescue-SAMD-10-rescue-SAM32-rescue, MPN=ATSAMD51J19A-AU, Field4="120MHZ 512KB Flash 64 TQFP PKG inTray 85CTemp, 64 TQFP 10x10x1mm TRAY", Field5="TQFP-64 Microchip", Proto=ATSAMD51J19A-AU
U4: "HT-GPS200.20 GNSS module"
U5 U6 U12: library part CMP-04915-000001-1, "IC MTRDRV BIPLR 2.75-6.8V 10VSON", Manufacturer="Texas Instruments", Max Junction Temp=+150°C, Max Supply Voltage=6.8V, Min Supply Voltage=2.75V, Nominal Supply Current=1.4mA, Output Current=1A, Package=DRC0010J, Switching Frequency=44.5kHz, Temperature="-40°C to +85°C", Temperature Range High=+85°C, Temperature Range Low=-40°C, Automotive=No, Category=IC, ComponentLink2Description=Datasheet, ComponentLink2URL=http://www.ti.com/lit/ds/symlink/drv8830.pdf, Device Class L1="Integrated Circuits (ICs)", Device Class L2="Power Management ICs", Device Class L3="Motor Drivers", Digikey Description="IC MTRDRV BIPLR 2.75-6.8V 10VSON", Height=1mm, Lead Free=Yes, Motor Type=Brushed, Mouser Description="1A Low Voltage Brushed DC Motor Driver with Speed Regulation (I2C Ctrl) 10-VSON -40 to 85", MPN=DRV8830DRCR, Number Of Outputs=1, Octopart=https://octopart.com/drv8830drcr-texas+instruments-21221812, RoHS=TRUE, Standoff Height=0mm
U16: library part PE014005, MPN="PE014006 TE", Proto="JE-109D GOODSKY"
U18 U19: MPN=IRF7404TRPBF, Proto=DMP2022LSS-13
U21 U22 U23: library part CMP-0272-01137-3, "Precision, Low Power, Transimpedance Amplifier, 2.7 to 5 V, -40 to 125 degC, 8-pin SOP (DGK8), Green (RoHS & no Sb/Br)", Manufacturer="Texas Instruments", Total Supply Voltage(Max)(+5V is 5, +/-5V is 10)=5, Total Supply Voltage(Min)(+5V is 5, +/-5V is 10)=2.7, CMRR(Min)(dB)=95, Code_JEDEC=MO-187, ComponentLink1Description="Manufacturer URL", ComponentLink1URL=http://www.ti.com/, ComponentLink2Description=Datasheet, ComponentLink2URL=http://www.ti.com/general/docs/lit/getliterature.tsp?genericPartNumber=OPA2381&fileType=pdf, ComponentLink3Description="Package Specification", ComponentLink3URL=http://www.ti.com/litv/pdf/mpds028d, DatasheetVersion=SBOS313B, Eco-Plan="Green (RoHS & no Sb/Br)", IIB(Max)(pA)=50, Iq per channel(Max)(mA)=1, Mounting Technology="Surface Mount", Number of Channels=2, Offset Drift(Typ)(uV/C)=0.03, PackageDescription="8-Pin Thin Small Outline, Body 3 x 3 mm, Pitch 0.65 mm", PackageReference=DGK0008A, PackageVersion="4073329/E, 05/2006", PartNumber=OPA2381AIDGKT, Slew Rate(Typ)(V/us)=12, Sub Family="Low Offset Voltage Amplifier (<=500uV), Low Supply Voltage Amplifier (<=2.7V), Precision Amplifier", Vio (25C)(Max)(mV)=0.025
Y1: library part Crystal, MPN=ABS07-32.768KHZ-T, Proto=ABS07-32.768KHZ-T
J3 J4: MPN=TSW-126-14-G-D
U3: MPN=BMX160, Proto=BMX160
U8: MPN=MR25H40MDF, Proto=W25Q80DVSNIG
U24: Check_prices=https://www.snapeda.com/parts/AD5206BRUZ50/Analog+Devices/view-part/?ref=eda, SnapEDA_Link=https://www.snapeda.com/parts/AD5206BRUZ50/Analog+Devices/view-part/?ref=snap

## Via types
v1: diameter 0.584, hole 0.3, F.Cu to B.Cu, 176 vias
v2: diameter 0.584, hole 0.3, F.Cu to B.Cu, tented both sides, 42 vias
v3: diameter 0.5, hole 0.2, F.Cu to B.Cu, 29 vias
v4: diameter 1.27, hole 0.711, F.Cu to B.Cu, 2 vias

## Nets (pads, with @x,y where several pads share a name; then routed paths per layer and width w, separated by ;. In a path a pad name is that pad's centre, name@x,y a point inside that pad or via, vN(x,y) a via of type N, cw(c..) or ccw(c..) an arc to the next point about the centre after c; other vN are vias at no path point)
3.3V: C5.1 C7.1 C10.1 C11.1 C13.1 C15.1 C16.1 C30.1 C41.2 C42.2 C43.2 C44.1 D1.1 J1.4 J2.1 J4.27 J4.28 R3.1 R4.1 R44.1 R45.1 R50.2 R51.2 R67.2 R68.2 U1.2 U2.4 U2.8 U2.21 U2.34 U2.48 U2.56 U3.8 U3.12 U4.1 U4.2 U4.4 U5.4 U5.7 U6.4 U6.7 U6.8 U8.8 U12.4 | length 56.6
  F.Cu w0.24: v1(184.619,76.025) 184.619,75.932 184.785,75.766 U12.4@184.785,75.298 ; v1(188.214,78.105) C41.2@188.214,79.03 ; v1(191.304,71.279) 191.716,71.735 ccw(c191.538,71.896) 191.778,71.896 U5.7@191.778,72.514 ; v1(191.605,76.045) 191.605,75.952 191.778,75.778 U5.4@191.778,75.314 ; v1(195.528,68.907) 196.171,69.217 ccw(c196.067,69.434) 196.237,69.264 199.017,72.044 U6.7@199.017,72.387 U6.8@199.517,72.387 ; C43.2@198.501,84.314 201.464,84.314 cw(c201.464,84.074) 201.633,84.244 v1(201.676,84.201) ; v1(198.851,75.914) 198.851,75.821 199.017,75.655 U6.4@199.017,75.187 ; R4.1@205.82,39.072 205.825,39.067 205.825,38.872 ccw(c206.065,38.872) 205.825,38.859 v1(205.867,38.1) ; v1(250.063,22.606) U4.2@251.427,22.606 ; v1(250.317,27.686) U4.4@251.427,27.686
  F.Cu w0.272: C42.2@192.786,84.038 v1(192.786,84.963) ; 201.676,83.618 v1(201.676,84.201) ; D1.1@206.72,88.399 207.334,88.265 v1(208.026,88.265) ; v1(209.677,88.786) C5.1@209.677,89.479 ; U3.12@228.404,48.329 228.216,48.329 228.205,48.34 228.205,49.567 228.402,49.764 229.166,49.764 ; v1(229.108,50.165) 229.166,50.107 229.166,49.764 ; U3.8@230.166,49.091 230.155,49.102 230.155,49.539 229.93,49.764 229.166,49.764 ; C7.1@232.579,49.038 v1(232.579,49.971)
  F.Cu w0.3: v2(184.204,46.958) 184.259,47.013 185.618,47.013 R51.2@185.718,47.112 R51.2@185.393,47.4 ; C44.1@201.676,82.856 201.676,83.618 ; v1(203.581,48.968) 203.601,48.929 cw(c203.335,48.79) 203.635,48.793 203.635,48.792 203.635,48.714 204.006,48.343 R3.1@204.753,48.343 ; v1(210.168,50.877) 210.222,50.823 210.705,50.34 210.705,49.106 210.934,48.877 U2.48@210.934,48.768 ; U2.56@210.234,44.402 210.509,44.402 v1(210.917,44.402) ; v1(212.13,38.805) 212.13,38.882 212.434,39.186 U2.4@212.434,39.702 ; U2.8@214.434,39.702 214.434,39.111 214.928,38.617 214.928,37.379 cw(c214.628,37.379) 214.841,37.168 v1(214.503,36.83) ; U2.34@217.934,48.602 217.934,50.294 v1(218.694,51.054) ; U2.21@219.134,42.402 220.284,42.402 220.581,42.699 v1(220.658,42.699) ; v1(223.647,50.546) 224.236,50.546 ccw(c224.236,50.846) 224.295,50.552 cw(c224.236,50.846) 224.238,50.546 R45.1@224.511,50.546 R45.1@224.295,50.546 ; v1(223.888,46.249) 224.277,45.868 R50.2@224.565,45.543 ; R44.1@224.536,48.845 R45.1@224.536,50.624 ; U8.8@230.54,43.876 230.573,43.909 231.996,43.909 v1(232.029,43.942) 232.065,43.906 233.19,43.906 C30.1@233.226,43.869
  F.Cu w0.5: v1(189.857,61.019) R67.2@189.857,62.119 ; v1(193.413,60.892) R68.2@193.413,61.992 ; U4.1@251.427,20.066 U4.2@251.427,22.606
  B.Cu w0.272: 200.968,52.153 201.095,52.026 U1.2@202.965,52.026
  B.Cu w0.508: v2@184.214,46.939 J1.4@185.342,46.939
5V: C31.1 C32.1 C33.1 J4.25 J4.26 U21.8 U22.8 U23.8 U24.1 U24.6 | length 77.9
  F.Cu w0.4: U21.8@184.47,20.025 185.757,20.025 187,18.782 C33.1@187.325,18.782 ; U22.8@184.47,27.899 185.884,27.899 187,26.783 C31.1@187.325,26.783 194.74,26.783 194.818,26.86 ; U23.8@184.47,35.773 186.025,35.773 C32.1@187,34.798 ; U24.1@196.19,20.803 196.19,19.212 196.088,19.11 196.088,18.034 196.596,17.526 198.882,17.526 ; U24.6@199.441,20.803 199.441,18.085 198.882,17.526 ; J4.25@213.331,13.093 213.331,14.38 212.344,15.367 201.041,15.367 198.882,17.526
  F.Cu w0.5: C32.1@187,34.798 C32.1@187.325,34.798 194.056,34.798 194.818,34.036 194.818,26.86 194.818,19.685 ; C33.1@187.325,18.782 193.915,18.782 194.818,19.685 ; 196.088,19.11 195.513,19.685 194.818,19.685
  B.Cu w0.5: J4.26@213.331,10.553 J4.25@213.331,13.093
"Batt. Raw": D4.C J4.45 J4.46 R1.1 U16.1 U16.14 | length 120.1
  F.Cu w0.8: v1(236.347,73.406) 236.347,74.424 D4.C@236.623,74.701
  F.Cu w1.27: U16.1@225.425,79.121 232.203,79.121 236.623,74.701 D4.C@237.023,74.701 237.023,75.575 cw(c238.293,75.575) 237.394,76.472 239.673,78.75 cw(c240.57,77.851) 240.57,79.121 U16.14@243.205,79.121
  B.Cu w0.8: J4.45@187.931,13.093 192.11,17.272 213.741,17.272 236.325,39.856 R1.1@236.325,47.46 236.363,47.46 236.9,47.998 236.985,47.998 237.4,48.413 237.4,60.383 236.347,61.436 v1(236.347,73.406)
  B.Cu w1.27: J4.46@187.931,10.553 J4.45@187.931,13.093
BATTERY: C3.1 R1.2 R2.2 U2.15 | length 31.6
  F.Cu w0.272: v2(217.932,40.513) v2(217.932,40.513) 217.933,39.703 U2.15@217.934,39.702
  F.Cu w0.279: C3.1@234.27,49.042 234.606,49.043 v2(235.526,49.043)
  Route15 w0.272: v2(217.932,40.513) 218.287,39.645 ccw(c218.538,39.749) 218.314,39.597 ccw(c218.54,39.747) 218.347,39.556 218.714,39.189 ccw(c218.906,39.381) 218.906,39.109 233.688,39.109 ccw(c233.688,39.381) 233.88,39.189 235.446,40.755 ccw(c235.254,40.947) 235.526,40.947 235.526,46.148 v2(235.526,49.043)
  B.Cu w0.272: R2.2@234.103,49.038 234.104,49.037 236.324,49.037 R1.2@236.325,49.035
BURN_RELAY_A: Q2.1 R25.1 U2.28 | length 35.4
  F.Cu w0.272: v2(237.809,69.948) 238.952,69.948 Q2.1@239.63,70.627
  F.Cu w0.279: R25.1@237.517,68.424 237.809,68.716 v2(237.809,69.948)
  F.Cu w0.3: U2.28@219.134,45.902 221.465,45.902 221.831,46.268 v2(221.845,46.268)
  Route15 w0.279: v2(221.845,46.268) 227.7,52.123 ccw(c227.502,52.321) 227.753,52.198 227.852,52.399 cw(c228.102,52.276) 227.859,52.413 v2(237.809,69.948)
CTS_RADIO: J3.27 U2.62 | length 35.6
  F.Cu w0.3: U2.62@210.234,41.402 210.838,41.402 211.172,41.068 ccw(c211.384,41.281) v2@211.198,41.045 ; v2@211.198,41.045 cw(c211.011,40.81) v2(211.288,40.927)
  Route15 w0.328: 210.654,9.023 209.612,10.065 209.612,13.717 210.791,14.896 210.791,39.358 cw(c211.119,39.357) 210.791,39.369 210.814,40.083 cw(c211.141,40.071) 210.863,40.244 v2(211.288,40.927) ; 210.655,9.022 cw(c210.422,8.791) 210.75,8.803 J3.27@210.791,7.683
ENAB_BURN1: R27.1 R32.2 U2.60 | length 55.8
  F.Cu w0.272: R27.1@170.495,66.104 170.583,66.016 v2(171.715,66.016) 172.846,66.016 172.903,66.072 R32.2@172.934,66.104 ; v2(207.518,42.164) 207.603,42.164 207.84,42.402 U2.60@210.234,42.402
  Route15 w0.272: v2(171.715,66.016) 171.715,58.216 ccw(c171.986,58.216) 171.795,58.024 177.65,52.168 184.76,45.058 187.92,41.898 ccw(c188.112,42.091) 188.112,41.819 206.731,41.819 ccw(c206.731,42.091) 206.847,41.845 v2(207.518,42.164)
ENAB_BURN2: R28.1 R33.2 U2.32 | length 43.4
  F.Cu w0.203: v2(242.951,67.818) 244.069,67.818 R28.1@244.081,67.831 ; R28.1@244.094,67.843 R28.1@244.081,67.831 ; R33.2@244.119,69.478 R33.2@244.17,69.427 ; R28.1@244.17,68.172 244.107,67.928 244.085,67.846 R28.1@244.081,67.831
  F.Cu w0.3: U2.32@219.134,47.902 v2(220.659,47.902)
  F.Cu w0.5: R28.1@244.094,67.843 244.107,67.856 244.107,67.928 244.107,69.466 R33.2@244.119,69.478
  Route15 w0.203: v2(220.659,47.902) 220.659,45.254 221.89,44.022 224.913,44.022 ccw(c224.913,44.225) 225.056,44.081 242.82,61.845 ccw(c242.676,61.989) 242.879,61.986 v2(242.951,67.818)
EUV5: U2.11 U23.1 | length 44
  F.Cu w0.3: 184.658,37.084 194.887,37.084 200.2,31.772 211.195,31.772 ccw(c211.195,32.072) 211.371,31.829 v1(211.963,32.258) ; v1(215.9,35.941) 215.934,39.422 ccw(c215.434,39.427) 215.934,39.427 U2.11@215.934,39.702
  F.Cu w0.4: U23.1@180.02,35.773 181.921,35.773 183.232,37.084 184.658,37.084
  Route15 w0.3: v1(211.963,32.258) v1(215.9,35.941)
EUV_BIAS: U21.3 U21.5 U22.3 U22.5 U23.3 U23.5 U24.2 | length 45
  F.Cu w0.4: U21.3@180.02,18.725 181.92,18.725 ; U22.3@180.02,26.599 181.933,26.599 ; U23.3@180.02,34.473 181.933,34.473 182.583,33.823 ; U21.5@184.47,18.075 182.57,18.075 181.92,18.725 ; U22.5@184.47,25.949 182.583,25.949 ; U23.5@184.47,33.823 182.583,33.823 ; v1(185.293,22.225) 183.026,22.225 182.583,22.668 ; v1(195.809,22.352) 195.844,22.387 196.434,22.387 196.85,21.971 U24.2@196.85,20.803 ; 181.92,18.725 182.583,19.388 182.583,22.668 ; 181.933,26.599 182.583,27.249 182.583,33.823 ; 181.933,26.599 182.583,25.949 ; 182.583,22.668 182.583,25.949
  B.Cu w0.4: v1(185.293,22.225) 185.343,22.225 185.47,22.352 v1(195.809,22.352)
FLASH_CS: R50.1 U2.24 U8.1 | length 8.6
  F.Cu w0.3: U2.24@219.134,43.902 224.784,43.902 U8.1@224.81,43.876 225.994,43.876 226.187,44.069 226.187,45.496 R50.1@226.14,45.543
FLASH_IO2: U2.19 U8.3 | length 5.7
  F.Cu w0.24: U2.19@219.134,41.402 219.146,41.39 224.755,41.39 U8.3@224.81,41.336
FLASH_IO3: U2.20 U8.7 | length 12.4
  F.Cu w0.3: U2.20@219.134,41.902 221.276,41.902 221.472,42.098 v2(221.488,42.098) ; v2(229.62,42.24) 229.674,42.295 229.854,42.295 230.165,42.606 U8.7@230.54,42.606
  Route15 w0.3: v2(221.488,42.098) 224.783,42.098 225.627,41.254 228.633,41.254 v2(229.62,42.24)
FLASH_MISO: U2.18 U8.2 | length 9.4
  F.Cu w0.279: U2.18@219.134,40.902 223.788,40.902 224.05,40.64 225.419,40.64 225.933,41.154 225.933,42.164 225.577,42.52 224.895,42.52 U8.2@224.81,42.606
FLASH_MOSI: U2.17 U8.5 | length 11.9
  F.Cu w0.272: U2.17@219.134,40.402 219.409,40.402 219.815,40.296 ccw(c219.978,40.919) 219.866,40.284 v2(221.742,39.954) ; v2(229.543,40.209) 229.603,40.149 230.457,40.149 U8.5@230.54,40.066
  Route15 w0.272: v2(221.742,39.954) 222.302,39.549 ccw(c222.461,39.769) 222.461,39.497 228.719,39.497 ccw(c228.719,39.769) 228.911,39.577 v2(229.543,40.209)
FLASH_SCK: U2.23 U8.6 | length 15.4
  F.Cu w0.279: U2.23@219.134,43.402 221.238,43.402 cw(c221.238,43.122) 221.407,43.345 v2(221.962,42.926) ; U8.6@230.54,41.336 230.573,41.369 232.123,41.369 v2(232.156,41.402)
  Route15 w0.279: v2(221.962,42.926) 230.632,42.926 v2(232.156,41.402)
GA01: J8.1 U21.2 U24.18 | length 40
  F.Cu w0.3: v1(197.104,23.114) 198.683,23.6 ccw(c198.596,23.887) 198.808,23.675 200.101,24.968 U24.18@200.101,26.441
  F.Cu w0.4: J8.1@174.485,27.672 175.655,27.672 176.022,27.305 176.022,22.492 ; v1(177.8,22.479) 177.787,22.492 176.022,22.492 ; U21.2@180.02,19.375 178.11,19.375 176.022,21.463 176.022,22.492
  Route15 w0.4: v1(177.8,22.479) 183.769,22.479 185.166,21.082 187.071,21.082 188.986,22.997 cw(c189.269,22.714) 189.269,23.114 v1(197.104,23.114)
GA02: J7.1 U21.6 U24.19 | length 37.5
  F.Cu w0.3: v1(198.247,24.384) 199.332,25.552 ccw(c199.113,25.757) 199.413,25.757 199.413,26.414 U24.19@199.441,26.441
  F.Cu w0.4: J7.1@174.485,17.976 174.543,18.034 176.657,18.034 178.673,16.018 184.508,16.018 ccw(c184.508,16.418) 184.791,16.135 185.429,16.773 ccw(c185.145,17.055) v1(185.545,17.055) 185.545,18.437 185.282,18.7 184.495,18.7 U21.6@184.47,18.725
  Route15 w0.4: v1(185.545,17.055) 188.251,17.055 188.732,17.536 ccw(c188.449,17.819) 188.849,17.819 188.849,21.14 cw(c189.249,21.14) 188.966,21.423 189.895,22.352 194.31,22.352 195.326,21.336 197.358,21.336 198.247,22.225 v1(198.247,24.384)
GA03: J6.1 U22.2 U24.15 | length 58.4
  F.Cu w0.3: v1(199.644,22.86) 202.057,25.273 U24.15@202.057,26.441
  F.Cu w0.4: J6.1@174.485,37.368 174.885,37.368 175.335,36.918 175.392,36.918 177.419,34.891 177.419,27.813 177.983,27.249 ; v1(177.546,26.162) 177.983,26.599 177.983,27.249 ; U22.2@180.02,27.249 177.983,27.249
  Route15 w0.4: v1(177.546,26.162) 177.546,24.296 176.657,23.407 176.657,18.2 ccw(c177.057,18.2) 176.774,17.917 178.573,16.118 ccw(c178.855,16.402) 178.853,16.002 188.595,16.002 189.484,16.891 189.484,20.828 189.992,21.336 193.785,21.336 194.818,20.303 197.747,20.303 199.609,22.164 199.609,22.825 v1(199.644,22.86)
GA04: J10.1 U22.6 U24.22 | length 46.4
  F.Cu w0.3: v1(196.469,25.146) 196.964,25.146 197.457,25.639 197.457,26.414 U24.22@197.485,26.441
  F.Cu w0.4: J10.1@174.485,47.063 176.076,47.063 176.403,46.736 v1(176.403,45.085) ; U22.6@184.47,26.599 184.495,26.574 185.389,26.574 185.674,26.289 185.674,24.781 185.313,24.419 184.693,24.419 v1(184.658,24.384)
  Route15 w0.4: v1(176.403,45.085) 176.403,32.639 v1(184.658,24.384) 185.049,23.993 ccw(c185.332,24.276) 185.332,23.876 195.033,23.876 ccw(c195.033,24.276) 195.316,23.993 v1(196.469,25.146)
GA05: J9.1 U23.2 U24.12 | length 60.1
  F.Cu w0.3: v1(200.914,22.225) 202.679,22.225 203.325,21.579 203.325,20.83 U24.12@203.352,20.803
  F.Cu w0.4: J9.1@174.485,56.759 174.495,56.769 176.784,56.769 177.419,56.134 177.419,36.937 v1(178.314,36.043) 179.208,35.148 179.995,35.148 U23.2@180.02,35.123
  Route15 w0.4: v1(178.314,36.043) 189.728,24.628 ; 189.729,24.627 ccw(c190.011,24.911) 190.011,24.511 193.794,24.511 ccw(c193.794,24.911) 194.076,24.628 195.672,26.223 cw(c195.954,25.94) 195.953,26.34 195.954,26.34 198.653,26.34 200.914,24.079 v1(200.914,22.225)
GB01: U2.5 U21.1 U24.16 U24.17 | length 52.9
  F.Cu w0.3: v1(200.914,25.146) 200.736,25.324 U24.17@200.736,26.441 ; v1(201.041,28.448) 201.041,28.371 200.736,28.066 U24.17@200.736,26.441 ; U24.16@201.397,26.441 U24.17@200.736,26.441 ; v1(202.438,31.049) 202.499,30.988 211.677,30.988 212.934,32.245 U2.5@212.934,39.427 ; U2.5@212.934,39.424 ccw(c212.434,39.427) U2.5@212.934,39.427 ; U2.5@212.934,39.702 U2.5@212.934,39.427
  F.Cu w0.4: v1(178.435,20.447) 178.857,20.025 U21.1@180.02,20.025
  Route15 w0.3: v1(201.041,28.448) 202.438,29.845 v1(202.438,31.049)
  B.Cu w0.3: v1(178.435,20.447) 179.433,19.449 190.759,19.449 192.151,20.841 196.609,20.841 v1(200.914,25.146)
GB02: U2.6 U21.7 U24.20 U24.21 | length 48
  F.Cu w0.3: U24.21@198.145,26.441 U24.20@198.806,26.441 198.806,27.527 198.448,27.886 ; U2.6@213.434,39.702 213.434,32.076 cw(c213.134,32.076) 213.348,31.865 211.923,30.44 cw(c211.712,30.653) 211.712,30.353 200.657,30.353 ccw(c200.657,30.053) 200.445,30.265 198.448,28.268 ; 198.448,27.886 198.448,28.268 ; 198.448,27.886 198.174,27.886 v1(198.12,27.94) 198.448,28.268
  F.Cu w0.4: v1(183.769,21.082) 183.395,20.708 183.395,19.663 183.658,19.4 184.445,19.4 U21.7@184.47,19.375
  B.Cu w0.4: v1(183.769,21.082) 184.547,21.86 184.547,22.534 186.698,24.685 193.031,24.685 196.285,27.94 v1(198.12,27.94)
GB03: U2.9 U22.1 U24.13 U24.14 | length 53.8
  F.Cu w0.3: U24.14@202.692,26.441 U24.13@203.352,26.441 203.352,28.653 203.177,28.829 203.15,28.829 203.023,28.956 v1(202.946,28.956) ; U2.9@214.934,39.702 214.934,40.706 215.216,40.988 216.502,40.988 v1(216.535,41.021)
  F.Cu w0.4: v1(178.435,28.321) 178.857,27.899 U22.1@180.02,27.899
  B.Cu w0.3: v1(178.435,28.321) 179.903,29.789 202.113,29.789 v1(202.946,28.956) 207.407,33.417 212.074,33.417 216.535,37.878 v1(216.535,41.021)